# EAGLE board qo-100-pa-10W-driver (EAGLE 9.6.1)
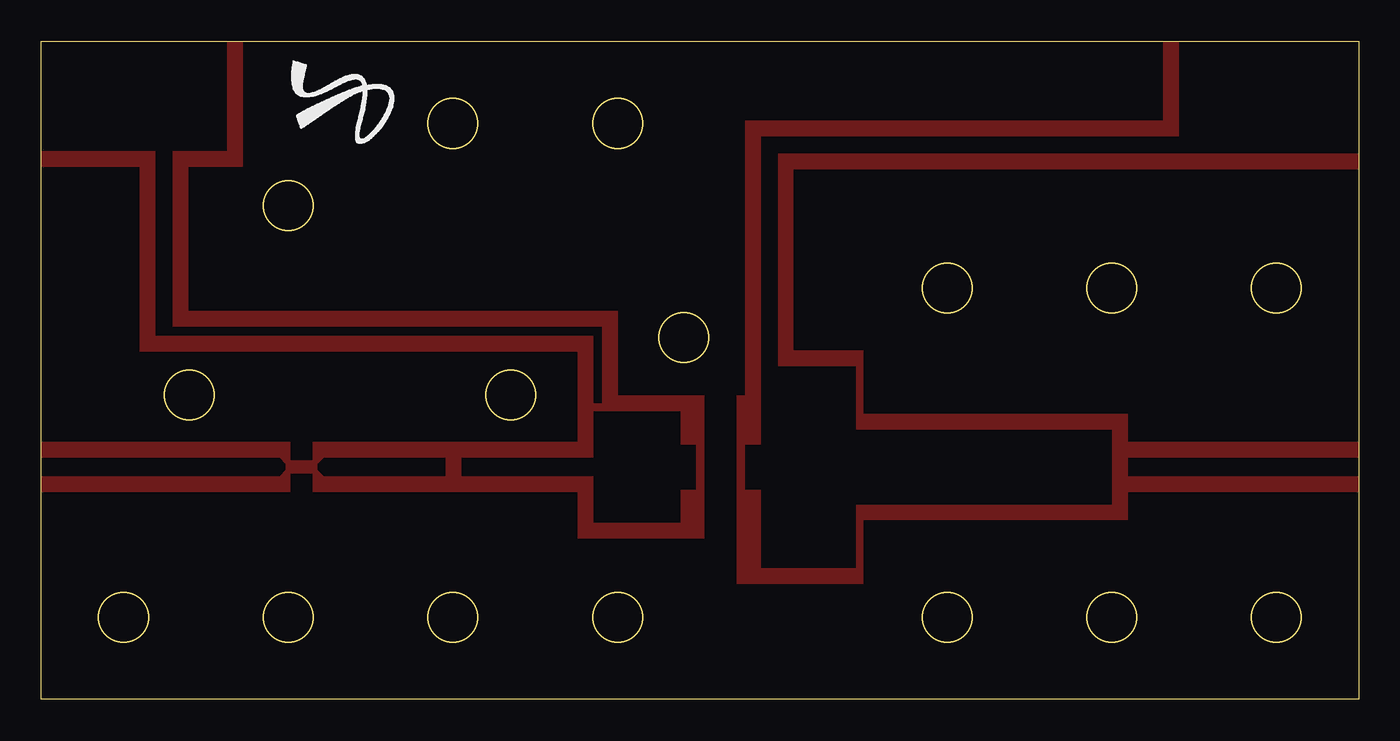
[diagram p0: board, top side]

Size 80 x 40 mm. Coordinates in mm from the lower left corner, seen from the top.
Outline: 0,0 0,40 80,40 80,0 0,0
Outline: circle at 9,18.5 radius 1.5
Outline: circle at 15,30 radius 1.5
Outline: circle at 25,35 radius 1.5
Outline: circle at 35,35 radius 1.5
Outline: circle at 39,22 radius 1.5
Outline: circle at 55,25 radius 1.5
Outline: circle at 65,25 radius 1.5
Outline: circle at 75,25 radius 1.5
Outline: circle at 75,5 radius 1.5
Outline: circle at 65,5 radius 1.5
Outline: circle at 55,5 radius 1.5
Outline: circle at 35,5 radius 1.5
Outline: circle at 25,5 radius 1.5
Outline: circle at 15,5 radius 1.5
Outline: circle at 28.5,18.5 radius 1.5
Outline: circle at 5,5 radius 1.5
Copper layers (1*16): Top 0.035mm / dielectric 0.15mm / Bottom 0.035mm
Design rules "default *": minimum track width 6mil, minimum drill 0.35mm, track to track 0mil, track to pad 6mil, pad to pad 6mil, via to via 6mil, smd to smd 6mil, copper to edge 0mil, drill to drill 6mil, minimum pad ring 10mil, minimum via ring 8mil, stop-mask expansion 4mil, vias tented up to drill 0mil, thermal gap 10mil
Holes 3 mm at 5,5 15,5 25,5 35,5 65,5 65,25 55,25 35,35 25,35 15,30 28.5,18.5 9,18.5 75,5 75,25 55,5 39,22

## Placement (x,y rotation side)
E$1  [JS_5MM]  15,39 90 top

## Library data of the parts
E$1 = Silkscreen

## Tracks (layer width: path | path; a pad name or v marks a point on that pad's centre or on a via)
BIAS1
  cutout Top: 33.54,18 33.54,22.13 6.95,22.13 6.95,33.33 0,33.33 0,40 11.27,40 11.27,33.33 7.95,33.33 7.95,22.63 34.04,22.63 34.04,18
BIAS2
  cutout Top: 43.71,20.24 43.71,34.21 69.09,34.21 69.09,40 80,40 80,33.21 44.71,33.21 44.71,20.24
GATE
  cutout Top: 25.54,13.59 33.54,13.59 33.54,10.75 38.79,10.75 38.79,12.77 39.74,12.77 39.74,13.07 39.74,13.57 39.74,13.87 39.74,14.37 39.74,14.67 39.74,15.17 39.74,15.47 38.79,15.47 38.79,17.5 33.54,17.5 33.54,14.66 25.54,14.66
GATE1
  cutout Top: 65,16.37 65,11.87 49.46,11.87 49.46,7.99 43.71,7.99 43.71,12.77 42.76,12.77 42.76,13.07 42.76,13.57 42.76,13.87 42.76,14.37 42.76,14.67 42.76,15.17 42.76,15.47 43.71,15.47 43.71,20.24 49.46,20.24 49.46,16.37
GN
  cutout Top: 16.45,13.7 16.45,12.59 15.15,12.59 15.15,13.7
GN1
  cutout Top: 15.15,14.55 15.15,15.66 16.45,15.66 16.45,14.55
GND
  cutout Top: 0,15.66 32.54,15.66 32.54,21.13 5.95,21.13 5.95,32.33 0,32.33
  cutout Top: 0,0 80,0 80,12.59 66,12.59 66,10.87 49.96,10.87 49.96,6.99 42.2,6.99 42.2,18.5 42.71,18.5 42.71,35.21 68.09,35.21 68.09,40 12.27,40 12.27,32.33 8.95,32.33 8.95,23.63 35.04,23.63 35.04,18.5 40.3,18.5 40.3,9.75 32.54,9.75 32.54,12.59 0,12.59
  cutout Top: 80,15.66 66,15.66 66,17.37 49.96,17.37 49.96,21.24 45.71,21.24 45.71,32.21 80,32.21
IN
  cutout Top: 0,14.66 0,13.59 14.47,13.59 14.82,13.94 14.82,14.31 14.47,14.66
IN1
  cutout Top: 24.54,14.66 17.15,14.66 16.8,14.31 16.8,13.94 17.15,13.59 24.54,13.59
IN2
  cutout Top: 66,14.66 66,13.59 80,13.59 80,14.66
NEGATIVE
  pour Top: 0,0 80,0 80,40 0,40